# Altium PCB PCB.PcbDoc
Units mil, origin at the board's own origin, x right, y up, seen from the top; angles counter-clockwise.
Board outline 6000 x 4000 mil, 2 copper layers (Top Layer, Bottom Layer); 13 components, 12 nets, 89 pads, 0 vias.
Unrouted connection lines stored in the file: 32.
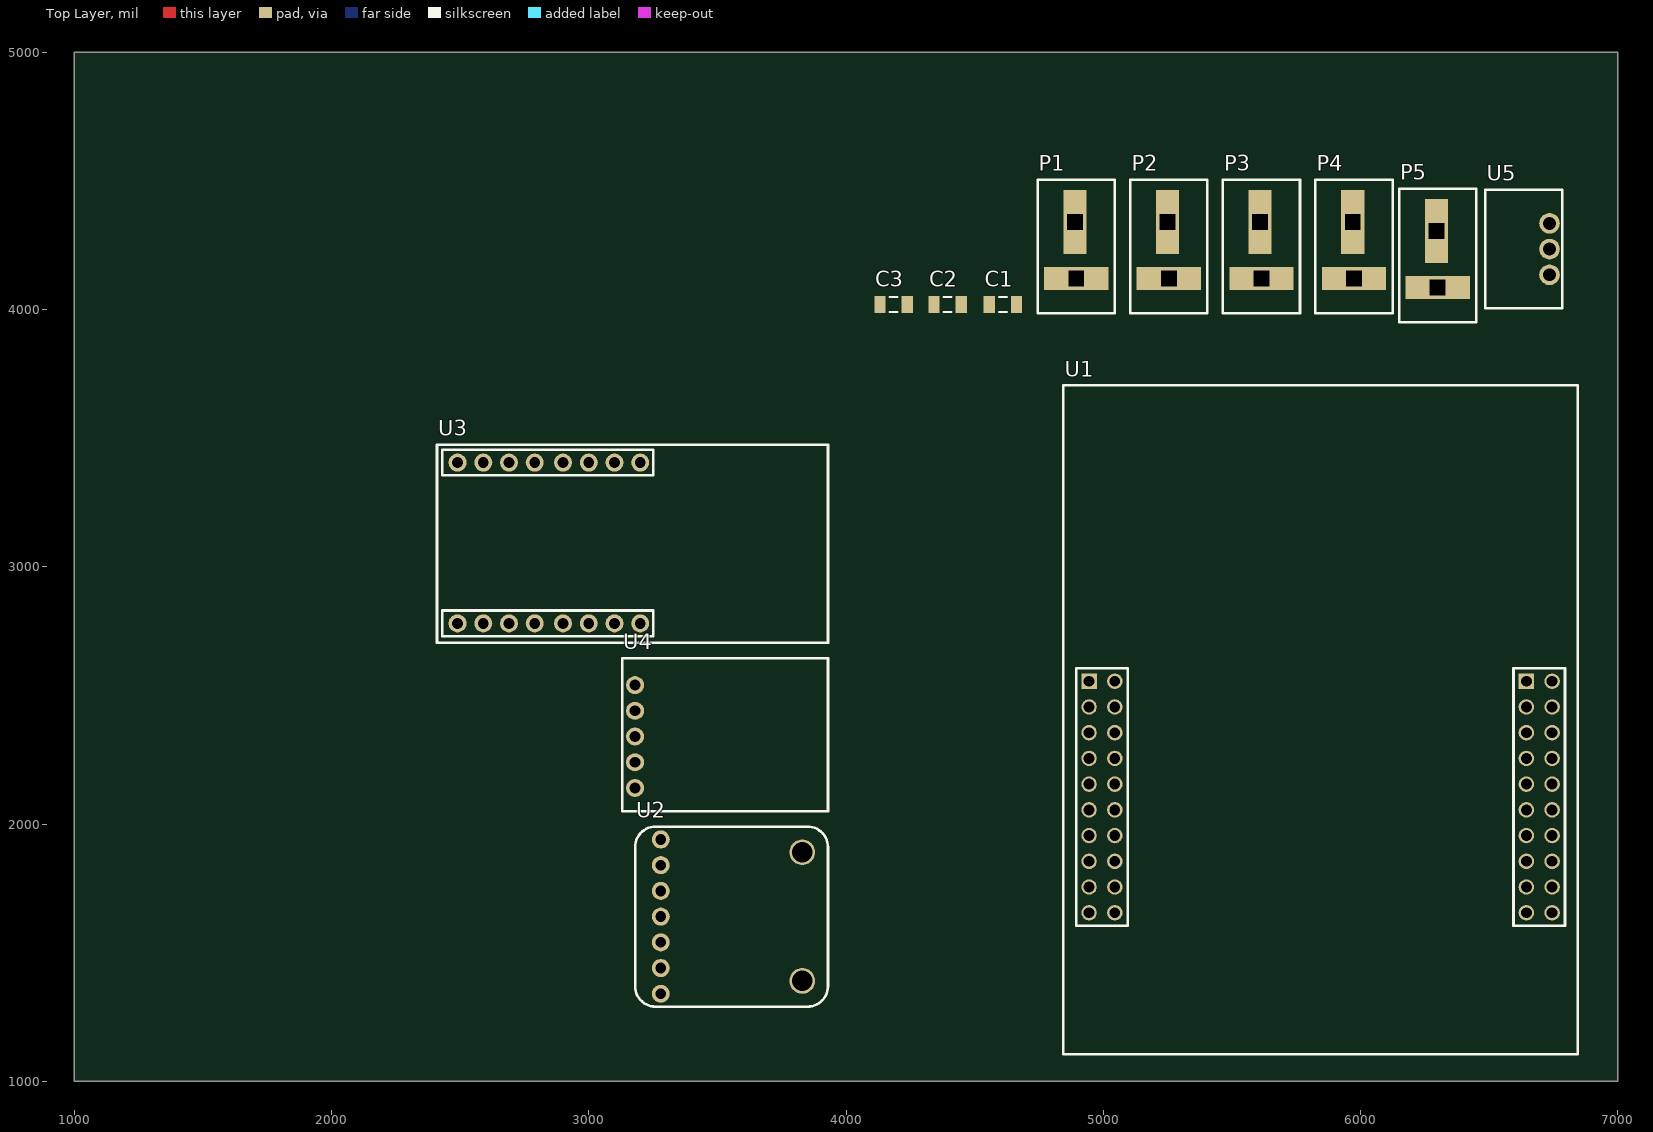
[diagram p0: Top Layer view]
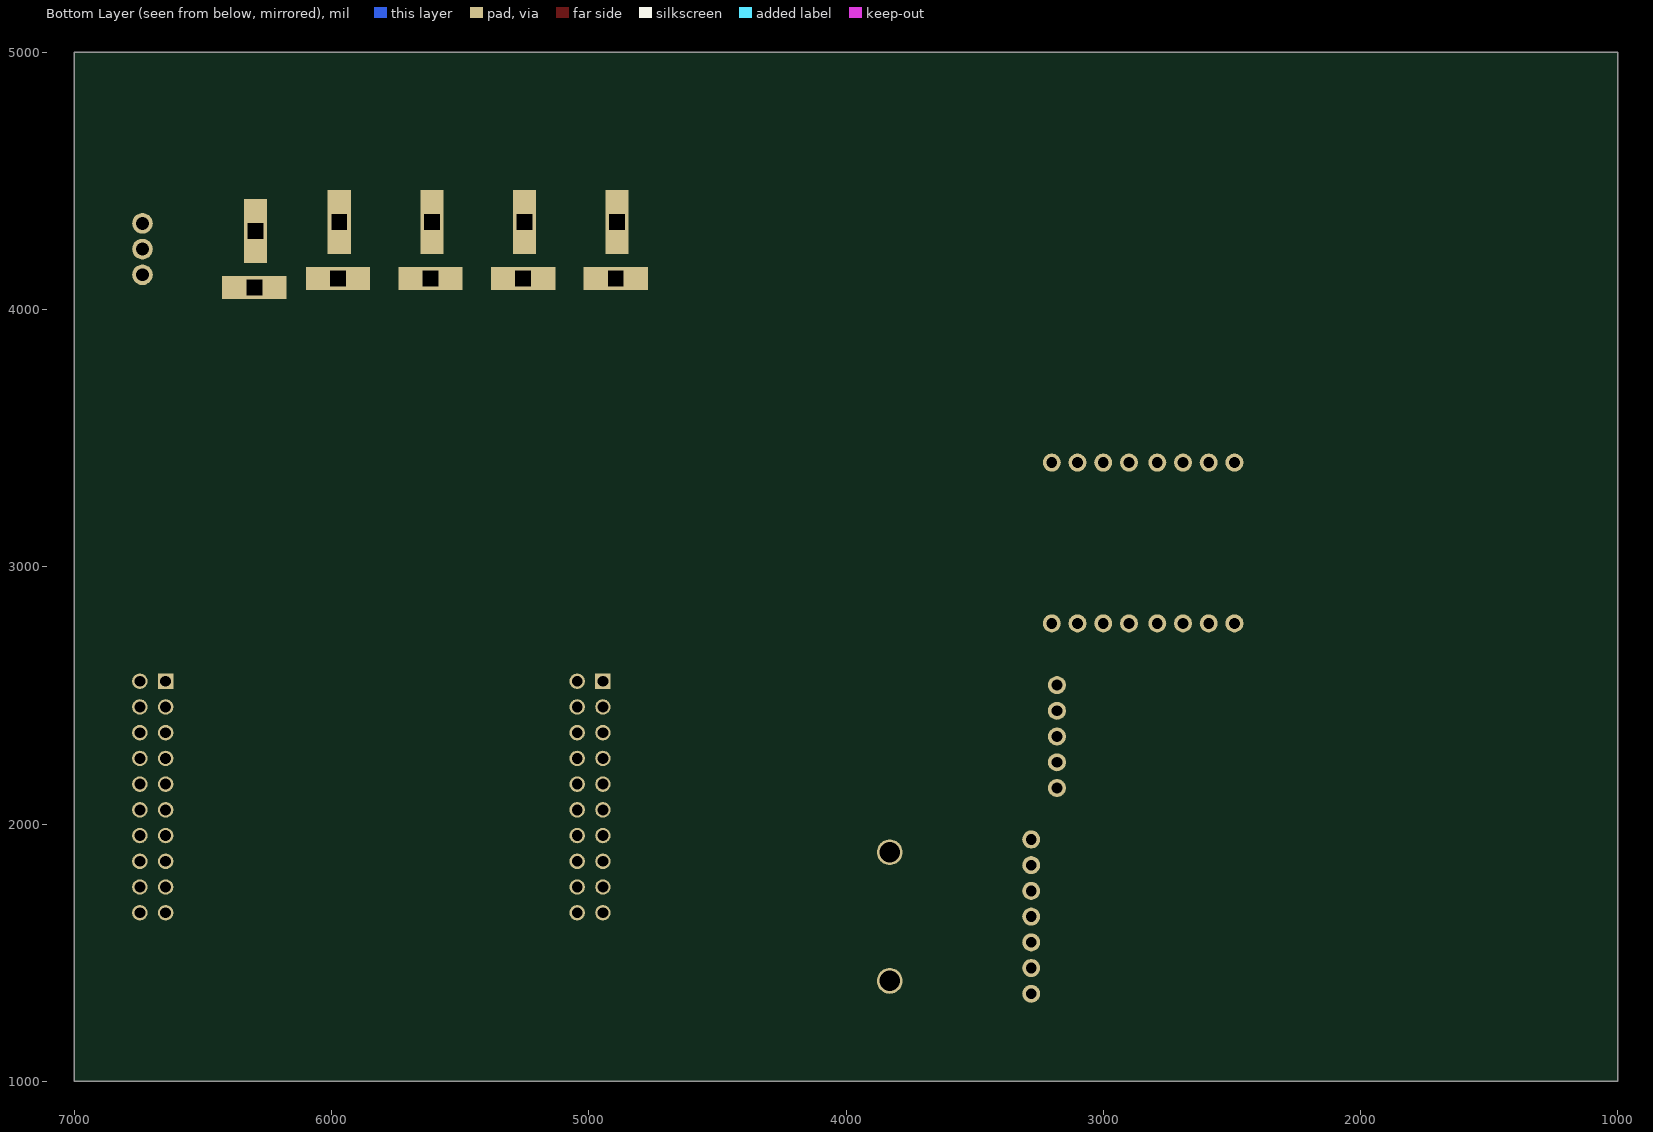
[diagram p1: Bottom Layer view, seen from below]

## Layer stack, top to bottom
Top Solder: solder mask 0.4, Solder Resist, Dk 3.5
Top Layer: signal copper 1.4
Dielectric 1: dielectric 12.6, FR-4, Dk 4.8
Bottom Layer: signal copper 1.4
Bottom Solder: solder mask 0.4, Solder Resist, Dk 3.5

## Board outline
1000,1000 7000,1000 7000,5000 1000,5000

## Design rules (kind name [scope] priority, off if disabled: settings)
Clearance [All] p1: gap=10 ignorepadtopadclearanceinfootprint=FALSE except(0: Arc-Hole Track-Hole SMDPad-Hole THPad-Hole Via-Hole Fill-Hole Poly-Hole Region-Hole Text-Hole)
PolygonConnect [All] p1: connectstyle=Relief reliefconductorwidth=10 reliefentries=4 polygonreliefangle="90 Angle" airgapwidth=10
RoomDefinition Sensors [InComponentClass('Sensors')] p1: confinementstyle=ConfineIn formatcopy=TRUE lockcomponents=FALSE outline 1665,3490 1665,1275 4040,1275 4040,3490
RoomDefinition Power [InComponentClass('Power')] p2: confinementstyle=ConfineIn formatcopy=TRUE lockcomponents=FALSE outline 6860,4515 4095,4515 4095,3875 6860,3875
RoomDefinition Microcontroller [InComponentClass('Microcontroller')] p3: confinementstyle=ConfineIn formatcopy=TRUE lockcomponents=FALSE outline 4830,1095 6855,1095 6855,3815 4830,3815
RoutingVias [All] p1: holewidth=28 width=50 viastyle="Through Hole" minholewidth=28 minwidth=50 maxholewidth=28 maxwidth=50
SolderMaskExpansion [All] p1: expansion=4
Width [All] p1: maxlimit=10 minlimit=10 preferedwidth=10
30 further rules are at their usual default settings.

## Classes and differential pairs
component class Sensors: A1 A2 A3 A4 U2 U3 U4 U7
component class Power: C1 C2 C3 P1 P2 P3 P4 P5 U5
component class Microcontroller: U1

## Components (designator, comment, footprint, x,y, rotation, side; value= is the part's Value field where it differs from the comment)
C1 "Cap Semi" C1206 4610,4020 r180 top value=100pF
C2 "Cap Semi" C1206 4395,4020 r180 top value=100pF
C3 "Cap Semi" C1206 4185,4020 r180 top value=100pF
P1 "Dean's Connector" DEAN_CONN 5045,4505 r180 top
P2 "Dean's Connector" DEAN_CONN 5405,4505 r180 top
P3 "Dean's Connector" DEAN_CONN 5765,4505 r180 top
P4 "Dean's Connector" DEAN_CONN 6125,4505 r180 top
P5 "Dean's Connector" DEAN_CONN 6450,4470 r180 top
U1 "TIVA_Board" TIVA_AB 4945,2555 r0 top
U2 "BME280" BME280 3180,1990 r270 top
U3 "GPS" GPS_FOOTPRINT 2430,3455 r270 top
U4 "MPU" MPU 3130,2645 r270 top
U5 "VXO7805" VXO78-1000 6485,4465 r270 top

## Footprints (in the part's own frame and the unit in brackets; to place one, negate y for a bottom-side part, rotate by r counter-clockwise, add the part's x,y. Pads: shape width x height; smd on the part's side, far side on the other; paste and mask are expansions set on the pad)
BME280 [mil]
  round 70 hole 42: 1(50,100) 2(150,100) 3(250,100) 4(350,100) 5(450,100) 6(550,100) 7(650,100)
  round 100 hole 80: ""(100,650) ""(600,650)
  silkscreen extent 0,0 700,750
C1206 [mm] "Chip Capacitor, Body 3.2x1.6mm, IPC High Density"
  rect 1.1x1.7 smd: 1(-1.35,0) 2(1.35,0)
  silkscreen extent -0.4,-0.75 0.4,0.75, body extent -1.7,-0.9 1.7,0.9, height 1.3
DEAN_CONN [mil]
  rect 250x90 hole 60 square: 1(150,385)
  rect 90x250 hole 60 square: 2(155,165)
  silkscreen extent 0,0 300,520
GPS_FOOTPRINT [mil]
  round 70 hole 42: 1(50,770) 2(50,670) 3(50,570) 4(50,470) 5(50,360) 6(50,260) 7(50,160) 8(50,60) 9(675,60) 10(675,160) 11(675,260) 12(675,360) 13(675,470) 14(675,570) 15(675,670) 16(675,770)
  silkscreen extent -20,-20 750,1500
MPU [mil]
  round 70 hole 42: 1(105,50) 2(205,50) 3(305,50) 4(405,50) 5(505,50)
  silkscreen extent 0,0 595,800
TIVA_AB [mil]
  rect 60x60 hole 42: 1(0,0) 21(1700,0)
  round 60 hole 42: 2(0,-100) 3(0,-200) 4(0,-300) 5(0,-400) 6(0,-500) 7(0,-600) 8(0,-700) 9(0,-800) 10(0,-900) 11(100,-900) 12(100,-800) 13(100,-700) 14(100,-600) 15(100,-500) 16(100,-400) 17(100,-300) 18(100,-200) 19(100,-100) 20(100,0) 22(1700,-100) 23(1700,-200) 24(1700,-300) 25(1700,-400) 26(1700,-500) 27(1700,-600) 28(1700,-700) 29(1700,-800) 30(1700,-900) 31(1800,-900) 32(1800,-800) 33(1800,-700) 34(1800,-600) 35(1800,-500) 36(1800,-400) 37(1800,-300) 38(1800,-200) 39(1800,-100) 40(1800,0)
  silkscreen extent -100,-1450 1900,1150
VXO78-1000 [mil]
  round 80 hole 50: 1(130,250) 2(230,250) 3(330,250)
  silkscreen extent 0,0 460,300

## Part data
C1 C2 C3: "Capacitor (Semiconductor SIM Model)", LatestRevisionDate=29-May-2009, LatestRevisionNote="IPC-7351 Footprint Added.", PackageDescription="Chip Capacitor", PackageReference=C1206, Published=8-Jun-2000, Publisher="Altium Limited"

## Nets (pads, with @x,y where several pads share a name; then routed paths per layer and width w, separated by ;. In a path a pad name is that pad's centre, name@x,y a point inside that pad or via, vN(x,y) a via of type N, cw(c..) or ccw(c..) an arc to the next point about the centre after c; other vN are vias at no path point)
3.3V: C2.2 U1.1 U2.1 U3.7 U4.4
+5: C1.2 U1.20 U5.3
GND: C1.1 C2.1 C3.1 P1.2 P2.2 P3.2 P4.2 P5.2 U1.19 U1.40 U2.3 U3.8 U3.10 U4.3 U5.2
NetA1_1: U1.11
NetA2_1: U1.22
NetA3_1: U1.24
NetA4_1: U1.25
NetU1_17: U1.17 U2.6 U3.16 U4.2
NetU1_18: U1.18 U2.4 U3.15 U4.1
NetU1_26: U1.26
NetU1_27: U1.27
VCC: C3.2 P1.1 P2.1 P3.1 P4.1 P5.1 U5.1
pads on no net: U1.2 U1.3 U1.4 U1.5 U1.6 U1.7 U1.8 U1.9 U1.10 U1.12 U1.13 U1.14 U1.15 U1.16 U1.21 U1.23 U1.28 U1.29 U1.30 U1.31 U1.32 U1.33 U1.34 U1.35 U1.36 U1.37 U1.38 U1.39 U2. U2.2 U2.5 U2.7 U3.1 U3.2 U3.3 U3.4 U3.5 U3.6 U3.9 U3.11 U3.12 U3.13 U3.14 U4.5